# EAGLE board v1.0_board (EAGLE 9.4.2)
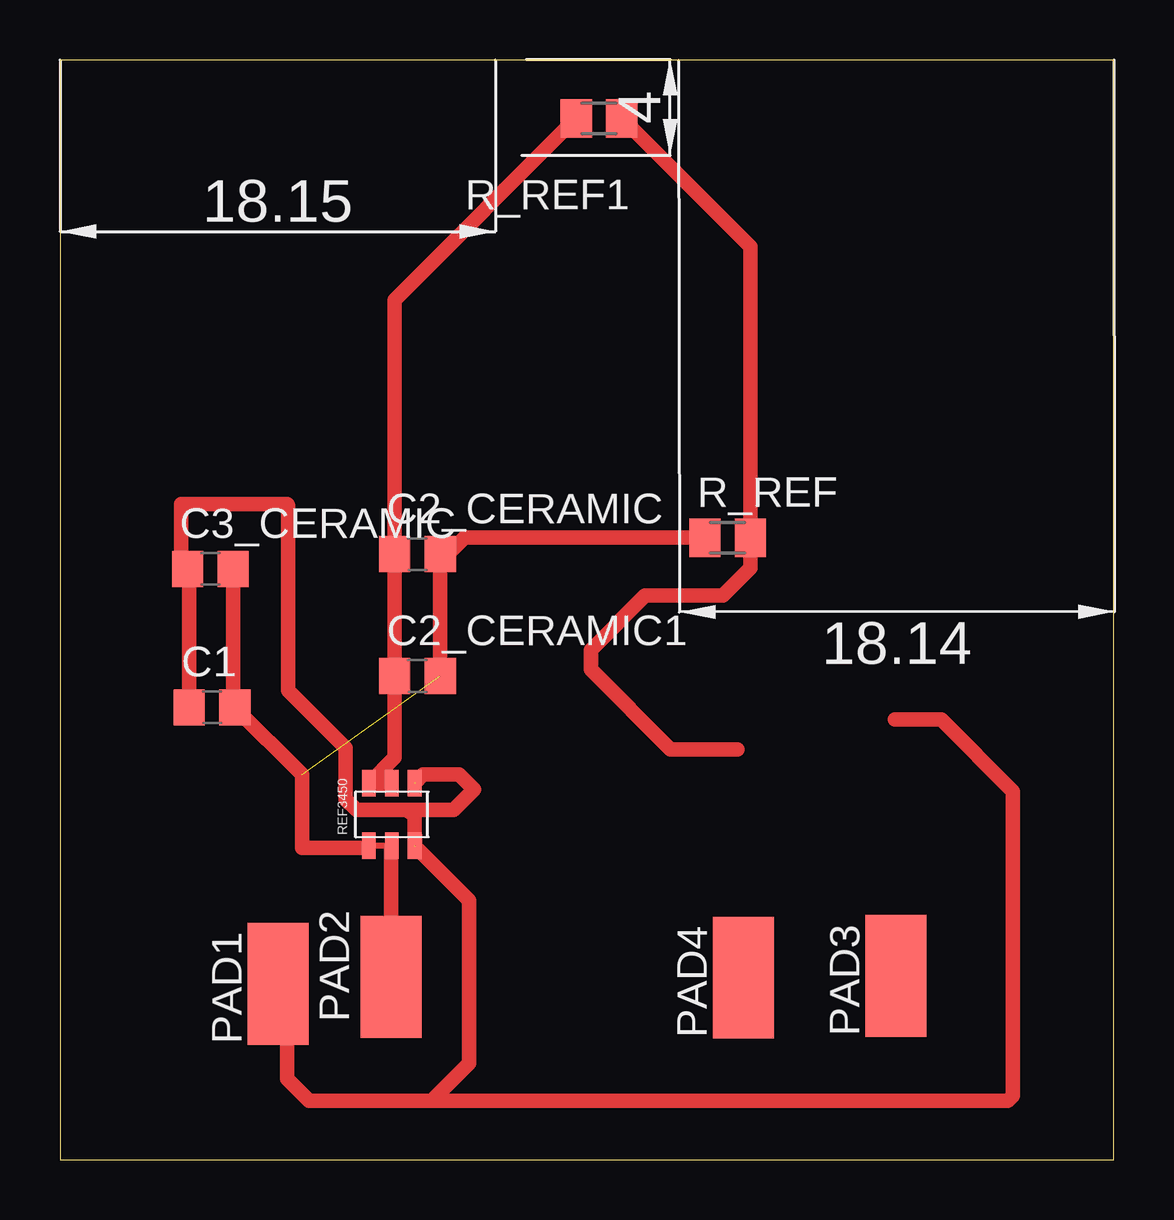
[diagram p0: board, top side]

Size 43.93 x 45.85 mm. Coordinates in mm from the lower left corner, seen from the top.
Outline: 0,0 43.93,0 43.93,45.85 0,45.85 0,0
Copper layers (1*16): Top 0.035mm / dielectric 1.5mm / Bottom 0.035mm
Design rules "TM_medit_aetzen": minimum track width 10mil, minimum drill 8mil, track to track 10mil, track to pad 10mil, pad to pad 10mil, via to via 15mil, smd to smd 8mil, copper to edge 40mil, drill to drill 8mil, minimum pad ring 10mil, minimum via ring 8mil, stop-mask expansion 4mil, vias tented up to drill 0mil, thermal gap 10mil

## Footprints (pad centres in the part's own frame; a part is rotated, then mirrored left to right if it is on the bottom)
C0805 = smd 1.3 x 1.5: 1 -0.95,0; 2 0.95,0
SMD2,54-5,08 = smd 2.54 x 5.08: 1 0,0
M0805 = smd 1.3 x 1.6: 1 -0.95,0; 2 0.95,0
UZUN = smd 1.1 x 0.6: P$1 0,0; P$2 0,-0.95; P$3 0,-1.9; P$4 2.6,-1.9; P$5 2.6,-0.95; P$6 2.6,0

## Placement (x,y rotation side)
C1  1u  [C0805]  6.34,18.87 0 top
C2_CERAMIC  10u  [C0805]  14.9,25.25 0 top
C2_CERAMIC1  0.1u  [C0805]  14.9,20.17 0 top
C3_CERAMIC  0.1u  [C0805]  6.27,24.64 0 top
PAD1  [SMD2,54-5,08]  9.09,7.34 0 top
PAD2  [SMD2,54-5,08]  13.8,7.64 0 top
PAD3  [SMD2,54-5,08]  34.84,7.67 0 top
PAD4  [SMD2,54-5,08]  28.48,7.6 0 top
R_REF  10k  [M0805]  27.83,25.94 0 top
R_REF1  10k  [M0805]  22.47,43.42 180 top
REF3450  REF3450IDBVR  [UZUN]  12.88,13.1 90 top

## Library data of the parts
C1 C2_CERAMIC C2_CERAMIC1 C3_CERAMIC = rcl; SPICEPREFIX: C
PAD1-PAD4 = wirepad
R_REF R_REF1 = rcl; SPICEPREFIX: R
REF3450 = Spannungsreferenzen

## Nets
GND: C1.2 C2_CERAMIC1.2 C2_CERAMIC.2 C3_CERAMIC.2 PAD2.1 R_REF.1 REF3450.P$1 REF3450.P$2
OUT_REF: C2_CERAMIC1.1 C2_CERAMIC.1 R_REF1.2 REF3450.P$5 REF3450.P$6
SIGNAL: PAD4.1
V_IN: R_REF1.1 R_REF.2
VDD: C1.1 C3_CERAMIC.1 PAD1.1 REF3450.P$3 REF3450.P$4
VSS: PAD3.1

## Tracks (layer width: path | path; a pad name or v marks a point on that pad's centre or on a via)
GND  (1 unrouted)
  Top 0.254: REF3450.P$2 REF3450.P$1
  Top 0.61: C1.2 7.45,18.71 | C3_CERAMIC.2 7.38,24.48 | C3_CERAMIC.2 7.54,24.64 | 16.17,19.85 C2_CERAMIC1.2 C2_CERAMIC.2 16.01,25.09 16.86,25.94 R_REF.1 | 13.8,9.86 PAD2.1 13.8,13.07 REF3450.P$2 | C3_CERAMIC.2 7.22,18.94 C1.2 | C1.2 10.1,16.06 10.1,13 12.78,13 REF3450.P$1
OUT_REF
  Top 0.61: REF3450.P$5 REF3450.P$6 13.95,16.77 C2_CERAMIC1.1 C2_CERAMIC.1 13.95,35.85 R_REF1.2
V_IN
  Top 0.61: R_REF1.1 28.78,38.06 R_REF.2 28.78,24.67 27.63,23.52 24.39,23.52 22.13,21.26 22.13,20.44 25.45,17.12 28.23,17.12
VDD  (2 unrouted)
  Top 0.61: 8.59,7.84 PAD1.1 9.46,6.97 9.46,3.39 10.39,2.46 15.49,2.46 | C1.1 5.39,24.57 C3_CERAMIC.1 5.06,24.9 5.06,27.33 9.46,27.33 9.52,27.27 9.52,19.57 11.91,17.18 11.91,15.03 12.36,14.59 14.5,14.59 | REF3450.P$3 17.06,10.82 17.06,4.03 15.49,2.46 | 14.79,13.1 14.79,13.5 14.78,13.52 14.78,14.31 14.5,14.59 | 14.5,14.59 16.41,14.59 17.26,15.44 16.64,16.06 15.14,16.06 14.79,15.71 14.79,15.7 | 15.49,2.46 39.51,2.46 39.72,2.67 39.72,15.37 36.73,18.36 34.81,18.36
VSS
  Top 0.61: PAD3.1 34.1,8.41